# Altium PCB PCB2.PcbDoc (part 1 of 2)
Units mm, origin at the board's own origin, x right, y up, seen from the top; angles counter-clockwise.
Board outline 102 x 102 mm, 2 copper layers (Top Layer, Bottom Layer); 216 components, 12 nets, 485 pads, 0 vias.
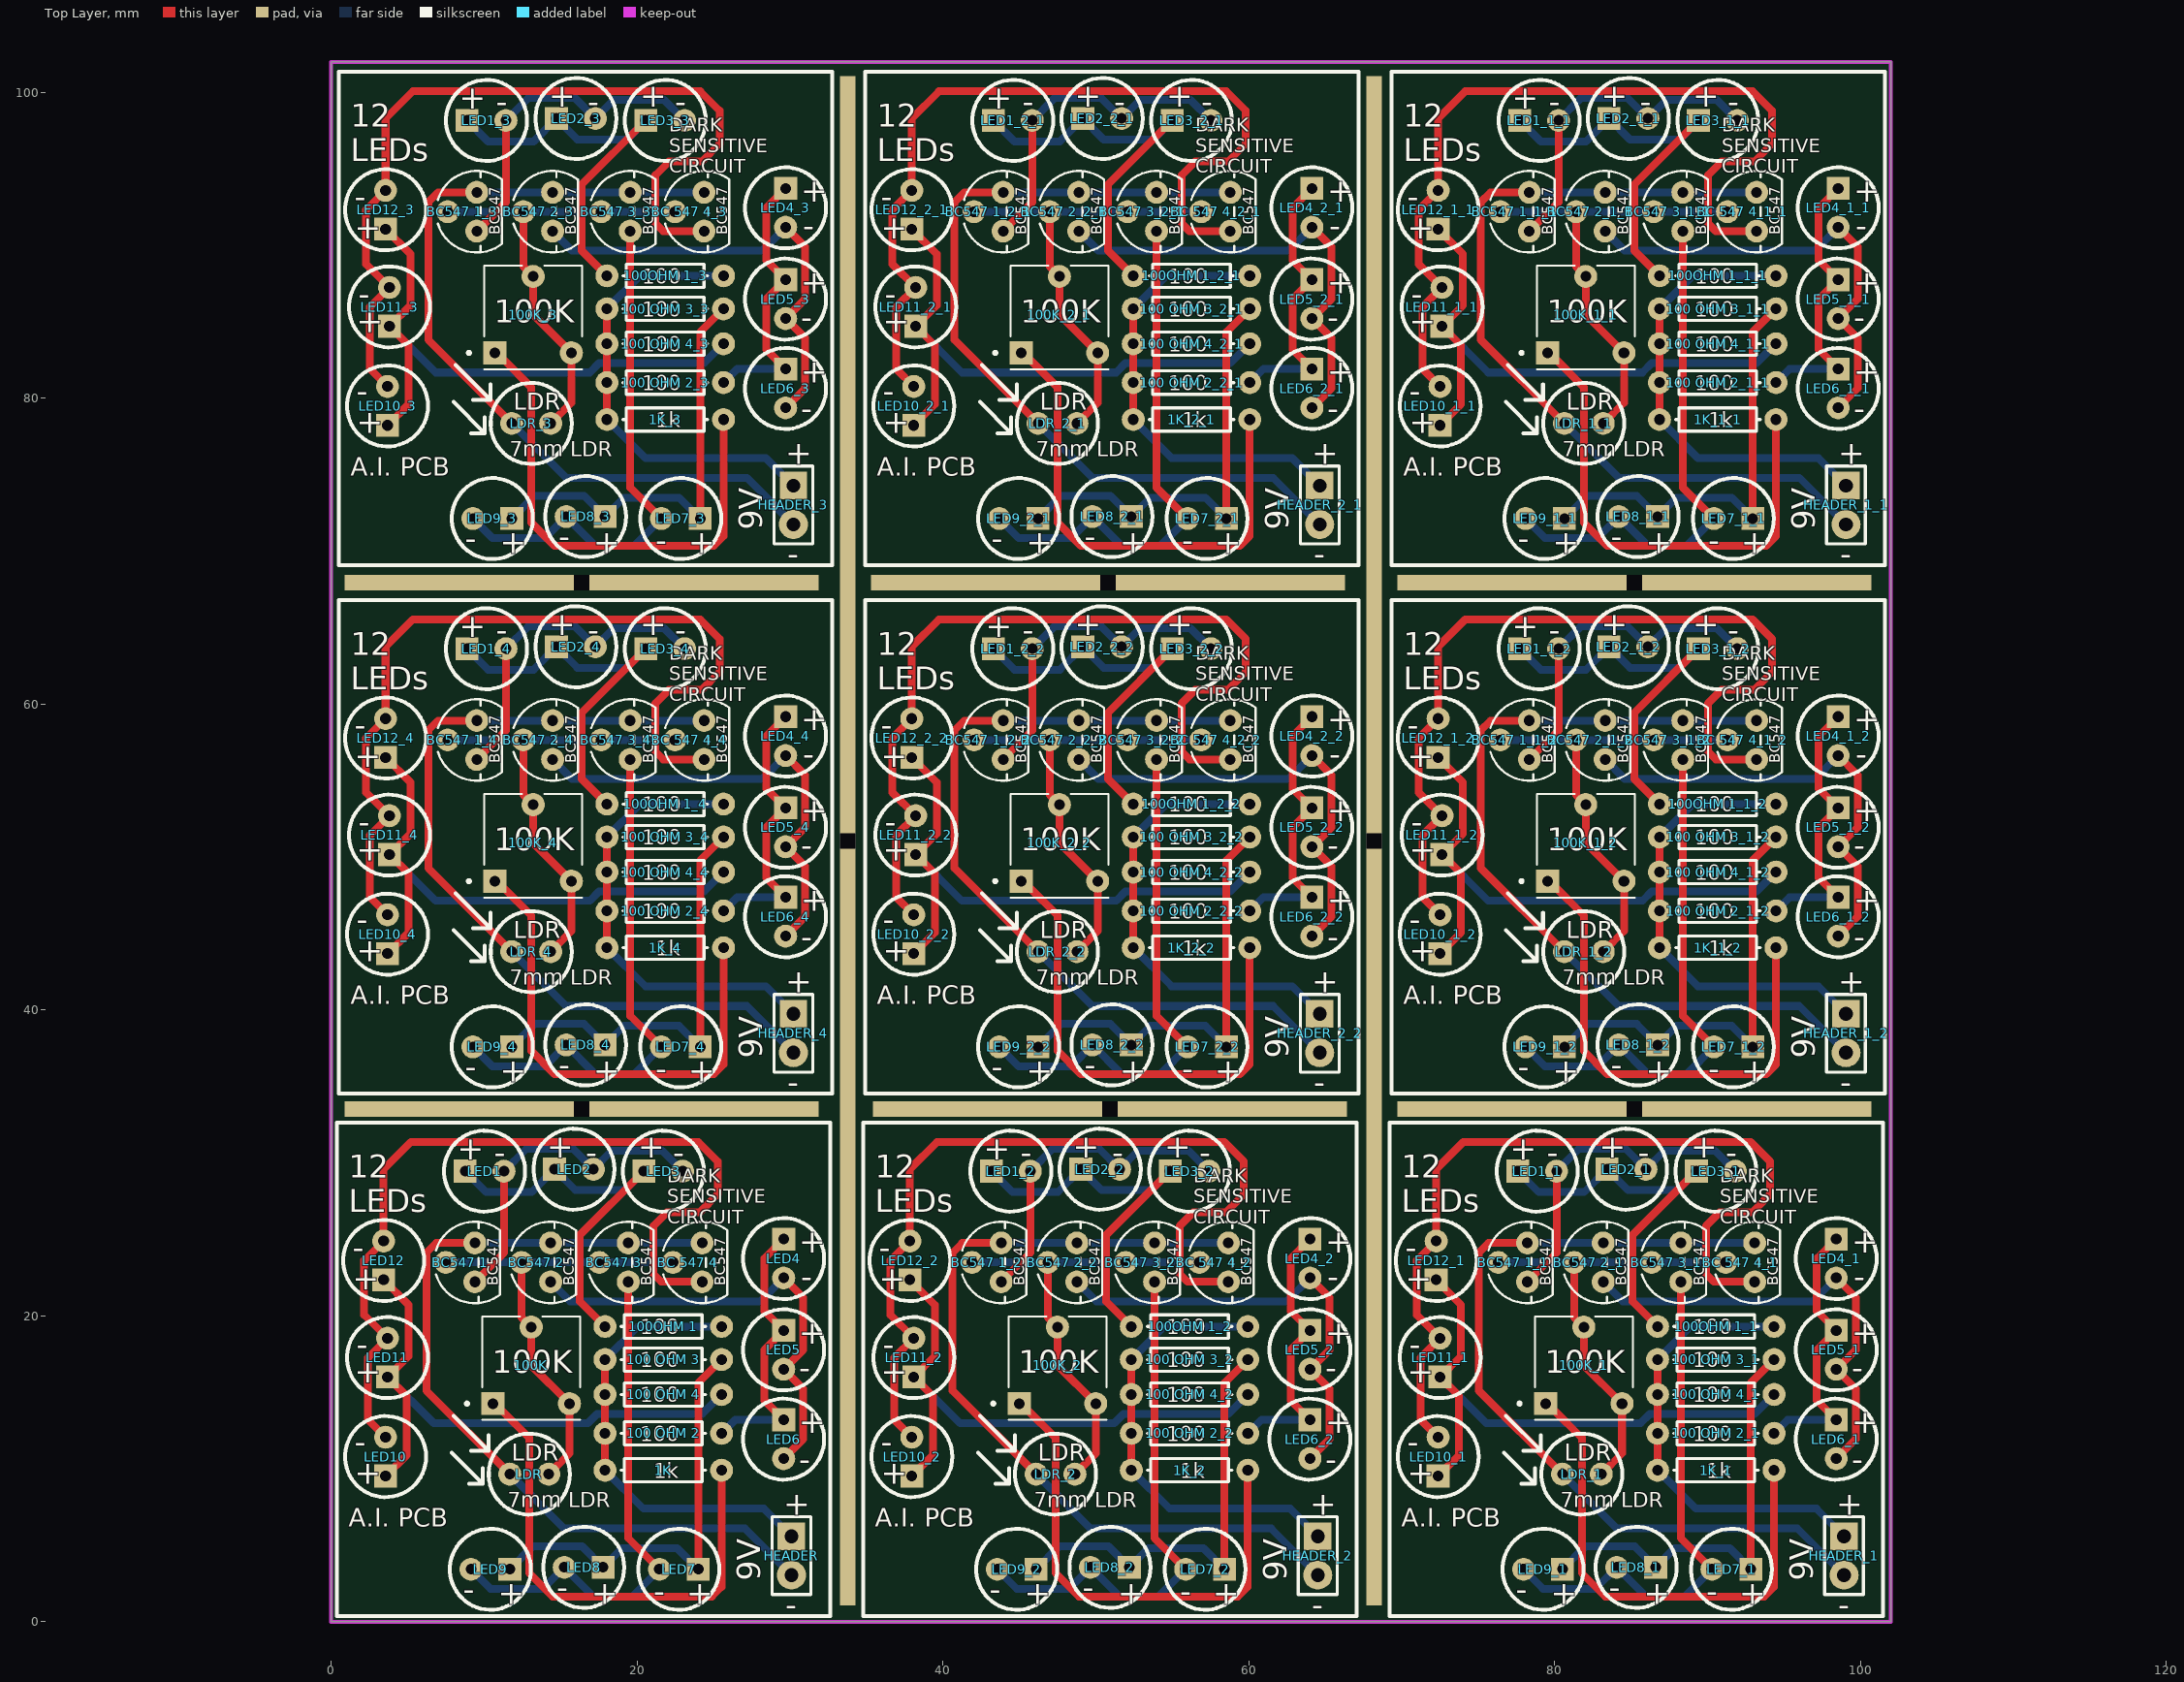
[diagram p0: Top Layer view]
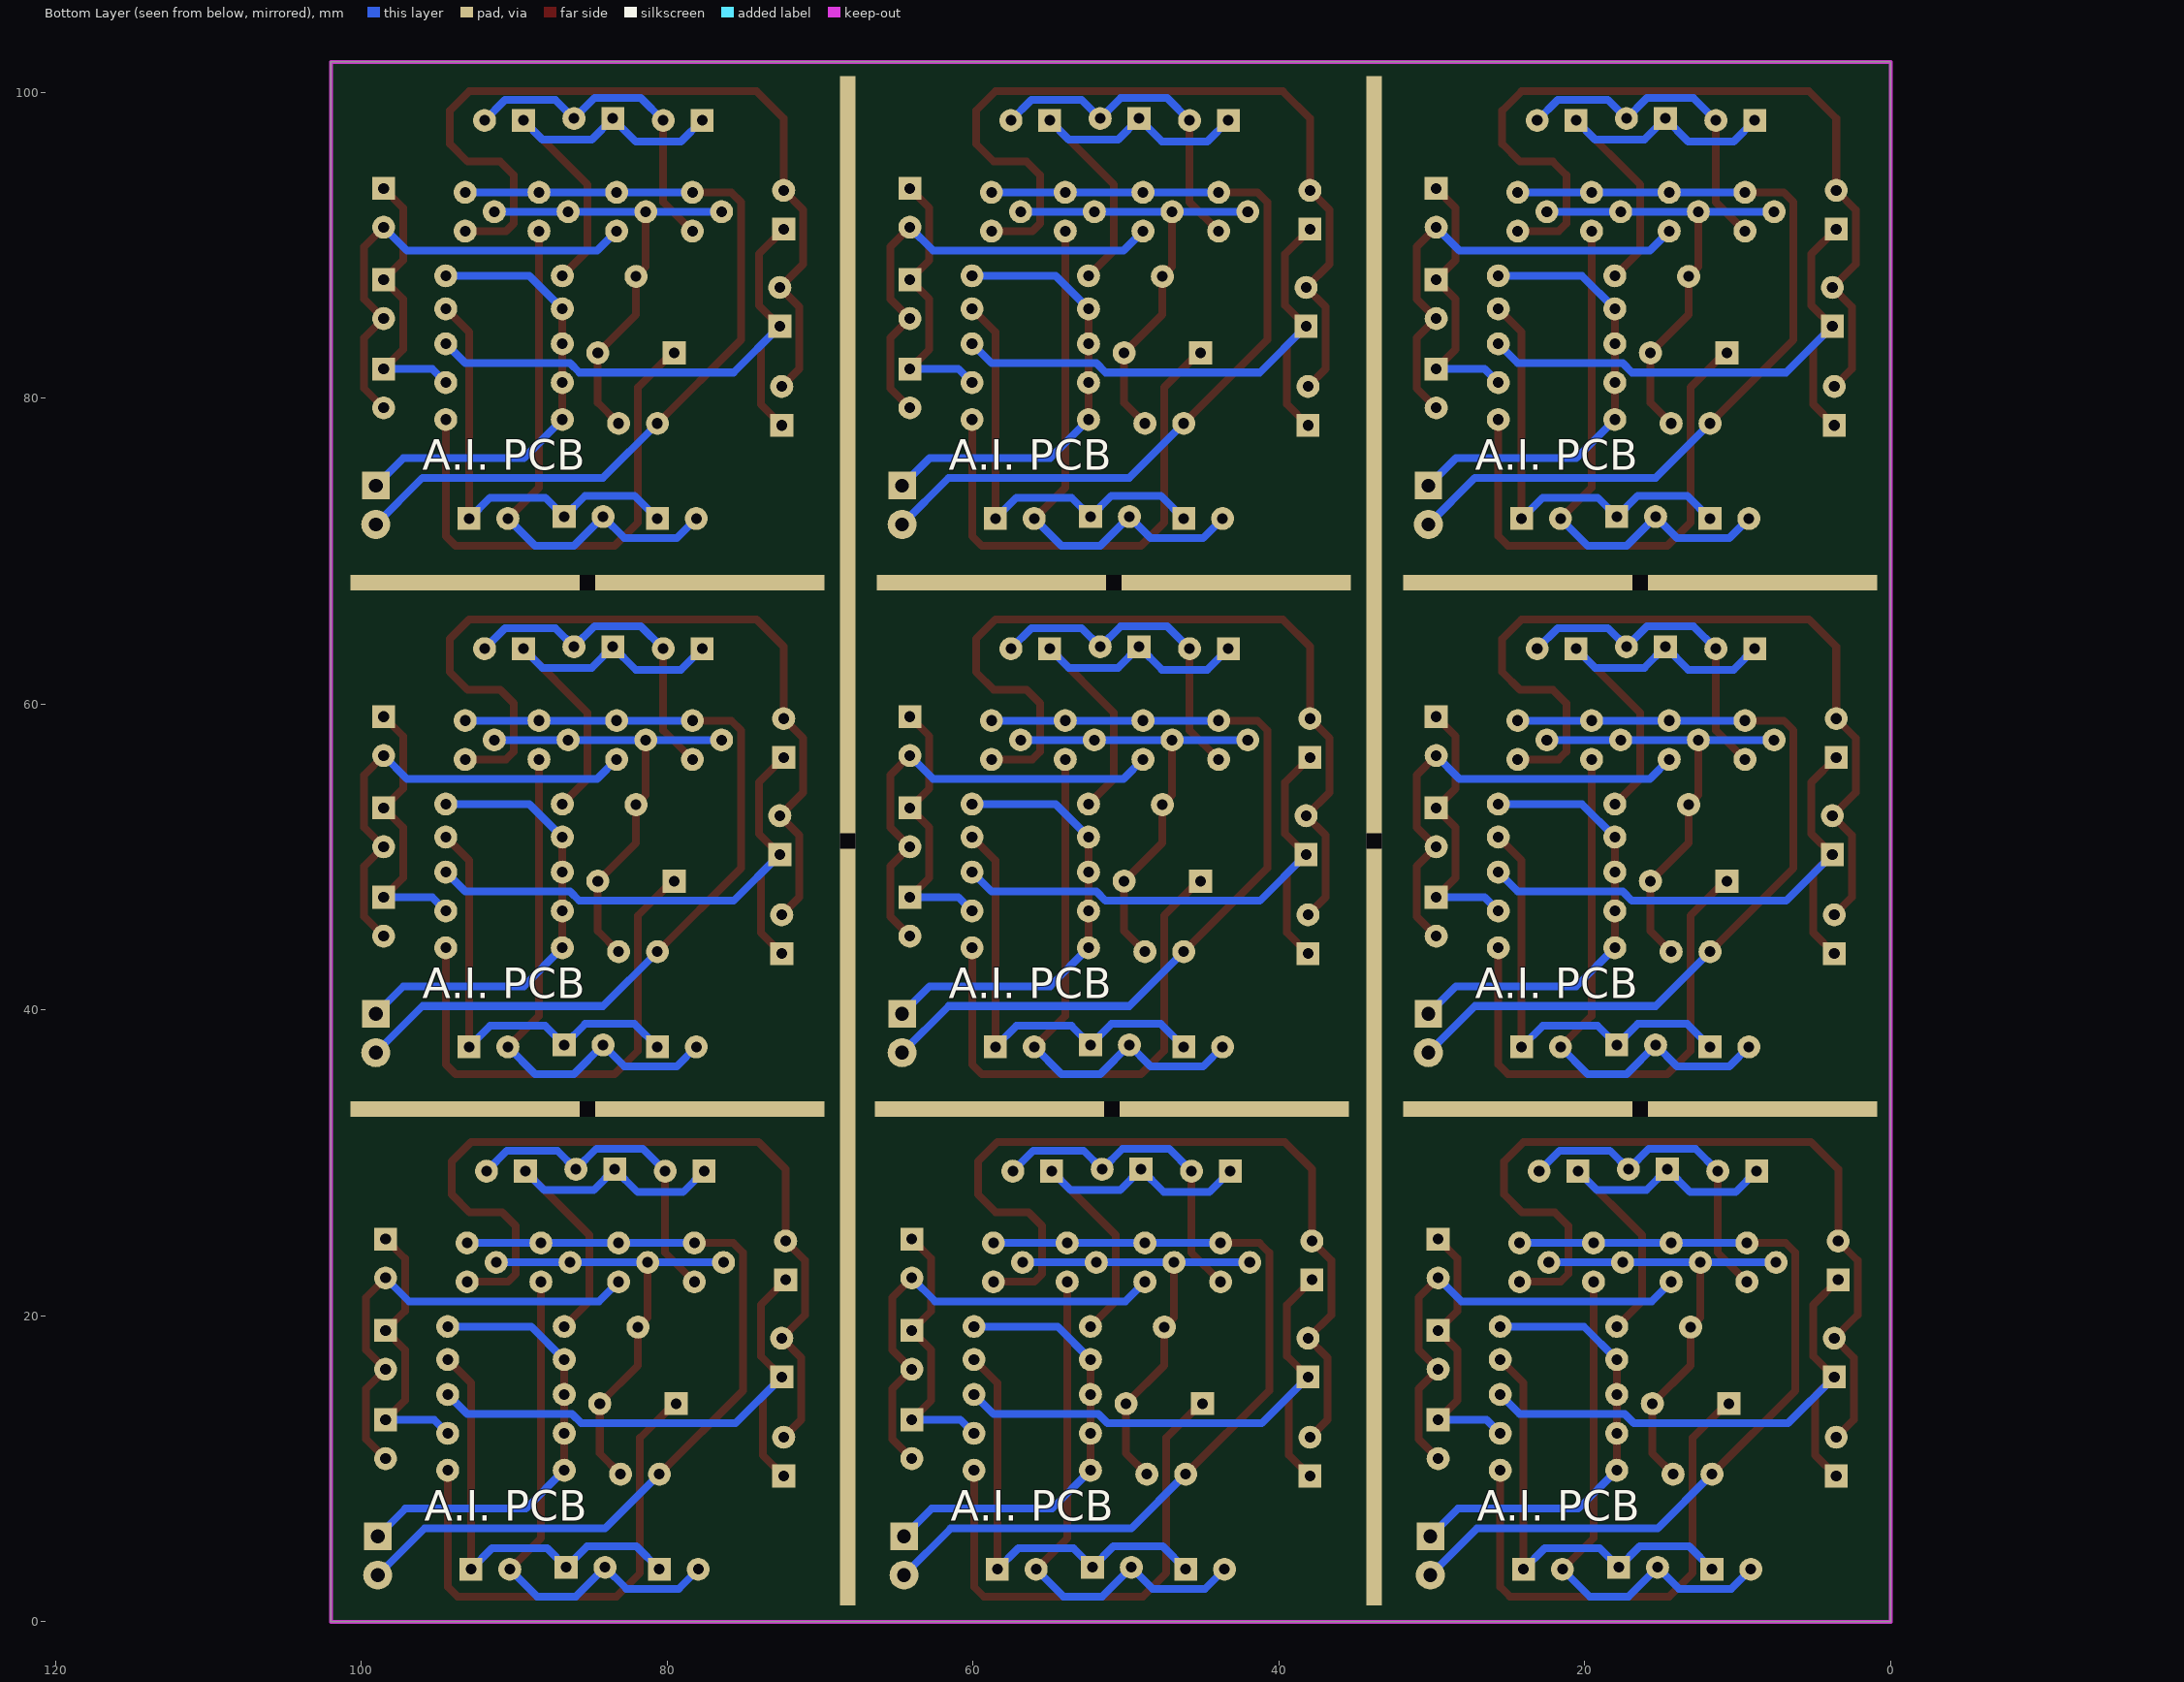
[diagram p1: Bottom Layer view, seen from below]

## Layer stack, top to bottom
Top Solder: solder mask 0.0102, Solder Resist, Dk 3.5
Top Layer: signal copper 0.0356
Dielectric 1: dielectric 0.32, FR-4, Dk 4.8
Bottom Layer: signal copper 0.0356
Bottom Solder: solder mask 0.0102, Solder Resist, Dk 3.5

## Board outline
0,0 0,102 102,102 102,0

## Design rules (kind name [scope] priority, off if disabled: settings)
Clearance [All] p1: gap=0.254 ignorepadtopadclearanceinfootprint=FALSE except(0: Arc-Hole Track-Hole SMDPad-Hole THPad-Hole Via-Hole Fill-Hole Poly-Hole Region-Hole Text-Hole)
PolygonConnect [All] p1: connectstyle=Relief reliefconductorwidth=0.254 reliefentries=4 polygonreliefangle="90 Angle" airgapwidth=0.254
RoutingVias [All] p1: holewidth=0.711 width=1.27 viastyle="Through Hole" minholewidth=0.711 minwidth=1.27 maxholewidth=0.711 maxwidth=1.27
SolderMaskExpansion [All] p1: expansion=0.102
Width [All] p1: maxlimit=0.762 minlimit=0.254 preferedwidth=0.508
30 further rules are at their usual default settings.

## Classes and differential pairs
component class Sheet2: 1K "100 OHM 2" "100 OHM 3" "100 OHM 4" 100K "100OHM 1" "BC547 1" "BC547 2" "BC547 3" "BC 547 4" HEADER LDR LED1 LED2 LED3 LED4 LED5 LED6 LED7 LED8 LED9 LED10 LED11 LED12

## Components (designator, comment, footprint, x,y, rotation, side; value= is the part's Value field where it differs from the comment)
1K "Res1" AXIAL-0.3 21.717,9.906 r180 top value=1K
1K_1 "Res1" AXIAL-0.3 90.551,9.906 r180 top value=1K (schematic designator 1K)
1K_1_1 "Res1" AXIAL-0.3 90.678,78.613 r180 top value=1K (schematic designator 1K)
1K_1_2 "Res1" AXIAL-0.3 90.678,44.069 r180 top value=1K (schematic designator 1K)
1K_2 "Res1" AXIAL-0.3 56.134,9.906 r180 top value=1K (schematic designator 1K)
1K_2_1 "Res1" AXIAL-0.3 56.261,78.613 r180 top value=1K (schematic designator 1K)
1K_2_2 "Res1" AXIAL-0.3 56.261,44.069 r180 top value=1K (schematic designator 1K)
1K_3 "Res1" AXIAL-0.3 21.844,78.613 r180 top value=1K (schematic designator 1K)
1K_4 "Res1" AXIAL-0.3 21.844,44.069 r180 top value=1K (schematic designator 1K)
"100 OHM 2" "Res1" AXIAL-0.3 21.717,12.319 r180 top value=1K
"100 OHM 2_1" "Res1" AXIAL-0.3 90.551,12.319 r180 top value=1K (schematic designator "100 OHM 2")
"100 OHM 2_1_1" "Res1" AXIAL-0.3 90.678,81.026 r180 top value=1K (schematic designator "100 OHM 2")
"100 OHM 2_1_2" "Res1" AXIAL-0.3 90.678,46.482 r180 top value=1K (schematic designator "100 OHM 2")
"100 OHM 2_2" "Res1" AXIAL-0.3 56.134,12.319 r180 top value=1K (schematic designator "100 OHM 2")
"100 OHM 2_2_1" "Res1" AXIAL-0.3 56.261,81.026 r180 top value=1K (schematic designator "100 OHM 2")
"100 OHM 2_2_2" "Res1" AXIAL-0.3 56.261,46.482 r180 top value=1K (schematic designator "100 OHM 2")
"100 OHM 2_3" "Res1" AXIAL-0.3 21.844,81.026 r180 top value=1K (schematic designator "100 OHM 2")
"100 OHM 2_4" "Res1" AXIAL-0.3 21.844,46.482 r180 top value=1K (schematic designator "100 OHM 2")
"100 OHM 3" "Res1" AXIAL-0.3 21.717,17.145 r180 top value=1K
"100 OHM 3_1" "Res1" AXIAL-0.3 90.551,17.145 r180 top value=1K (schematic designator "100 OHM 3")
"100 OHM 3_1_1" "Res1" AXIAL-0.3 90.678,85.852 r180 top value=1K (schematic designator "100 OHM 3")
"100 OHM 3_1_2" "Res1" AXIAL-0.3 90.678,51.308 r180 top value=1K (schematic designator "100 OHM 3")
"100 OHM 3_2" "Res1" AXIAL-0.3 56.134,17.145 r180 top value=1K (schematic designator "100 OHM 3")
"100 OHM 3_2_1" "Res1" AXIAL-0.3 56.261,85.852 r180 top value=1K (schematic designator "100 OHM 3")
"100 OHM 3_2_2" "Res1" AXIAL-0.3 56.261,51.308 r180 top value=1K (schematic designator "100 OHM 3")
"100 OHM 3_3" "Res1" AXIAL-0.3 21.844,85.852 r180 top value=1K (schematic designator "100 OHM 3")
"100 OHM 3_4" "Res1" AXIAL-0.3 21.844,51.308 r180 top value=1K (schematic designator "100 OHM 3")
"100 OHM 4" "Res1" AXIAL-0.3 21.717,14.859 r180 top value=1K
"100 OHM 4_1" "Res1" AXIAL-0.3 90.551,14.859 r180 top value=1K (schematic designator "100 OHM 4")
"100 OHM 4_1_1" "Res1" AXIAL-0.3 90.678,83.566 r180 top value=1K (schematic designator "100 OHM 4")
"100 OHM 4_1_2" "Res1" AXIAL-0.3 90.678,49.022 r180 top value=1K (schematic designator "100 OHM 4")
"100 OHM 4_2" "Res1" AXIAL-0.3 56.134,14.859 r180 top value=1K (schematic designator "100 OHM 4")
"100 OHM 4_2_1" "Res1" AXIAL-0.3 56.261,83.566 r180 top value=1K (schematic designator "100 OHM 4")
"100 OHM 4_2_2" "Res1" AXIAL-0.3 56.261,49.022 r180 top value=1K (schematic designator "100 OHM 4")
"100 OHM 4_3" "Res1" AXIAL-0.3 21.844,83.566 r180 top value=1K (schematic designator "100 OHM 4")
"100 OHM 4_4" "Res1" AXIAL-0.3 21.844,49.022 r180 top value=1K (schematic designator "100 OHM 4")
100K "" *TRIM_EVN-D8AA03B14 13.081,16.764 r0 top
100K_1 "" *TRIM_EVN-D8AA03B14 81.915,16.764 r0 top (schematic designator 100K)
100K_1_1 "" *TRIM_EVN-D8AA03B14 82.042,85.471 r0 top (schematic designator 100K)
100K_1_2 "" *TRIM_EVN-D8AA03B14 82.042,50.927 r0 top (schematic designator 100K)
100K_2 "" *TRIM_EVN-D8AA03B14 47.498,16.764 r0 top (schematic designator 100K)
100K_2_1 "" *TRIM_EVN-D8AA03B14 47.625,85.471 r0 top (schematic designator 100K)
100K_2_2 "" *TRIM_EVN-D8AA03B14 47.625,50.927 r0 top (schematic designator 100K)
100K_3 "" *TRIM_EVN-D8AA03B14 13.208,85.471 r0 top (schematic designator 100K)
100K_4 "" *TRIM_EVN-D8AA03B14 13.208,50.927 r0 top (schematic designator 100K)
"100OHM 1" "Res1" AXIAL-0.3 21.717,19.304 r0 top value=1K
"100OHM 1_1" "Res1" AXIAL-0.3 90.551,19.304 r0 top value=1K (schematic designator "100OHM 1")
"100OHM 1_1_1" "Res1" AXIAL-0.3 90.678,88.011 r0 top value=1K (schematic designator "100OHM 1")
"100OHM 1_1_2" "Res1" AXIAL-0.3 90.678,53.467 r0 top value=1K (schematic designator "100OHM 1")
"100OHM 1_2" "Res1" AXIAL-0.3 56.134,19.304 r0 top value=1K (schematic designator "100OHM 1")
"100OHM 1_2_1" "Res1" AXIAL-0.3 56.261,88.011 r0 top value=1K (schematic designator "100OHM 1")
"100OHM 1_2_2" "Res1" AXIAL-0.3 56.261,53.467 r0 top value=1K (schematic designator "100OHM 1")
"100OHM 1_3" "Res1" AXIAL-0.3 21.844,88.011 r0 top value=1K (schematic designator "100OHM 1")
"100OHM 1_4" "Res1" AXIAL-0.3 21.844,53.467 r0 top value=1K (schematic designator "100OHM 1")
"BC547 1" "BC547*" *TO92 9.398,23.495 r90 top
"BC547 1_1" "BC547*" *TO92 78.232,23.495 r90 top (schematic designator "BC547 1")
"BC547 1_1_1" "BC547*" *TO92 78.359,92.202 r90 top (schematic designator "BC547 1")
"BC547 1_1_2" "BC547*" *TO92 78.359,57.658 r90 top (schematic designator "BC547 1")
"BC547 1_2" "BC547*" *TO92 43.815,23.495 r90 top (schematic designator "BC547 1")
"BC547 1_2_1" "BC547*" *TO92 43.942,92.202 r90 top (schematic designator "BC547 1")
"BC547 1_2_2" "BC547*" *TO92 43.942,57.658 r90 top (schematic designator "BC547 1")
"BC547 1_3" "BC547*" *TO92 9.525,92.202 r90 top (schematic designator "BC547 1")
"BC547 1_4" "BC547*" *TO92 9.525,57.658 r90 top (schematic designator "BC547 1")
"BC547 2" "BC547*" *TO92 14.351,23.495 r90 top
"BC547 2_1" "BC547*" *TO92 83.185,23.495 r90 top (schematic designator "BC547 2")
"BC547 2_1_1" "BC547*" *TO92 83.312,92.202 r90 top (schematic designator "BC547 2")
"BC547 2_1_2" "BC547*" *TO92 83.312,57.658 r90 top (schematic designator "BC547 2")
"BC547 2_2" "BC547*" *TO92 48.768,23.495 r90 top (schematic designator "BC547 2")
"BC547 2_2_1" "BC547*" *TO92 48.895,92.202 r90 top (schematic designator "BC547 2")
"BC547 2_2_2" "BC547*" *TO92 48.895,57.658 r90 top (schematic designator "BC547 2")
"BC547 2_3" "BC547*" *TO92 14.478,92.202 r90 top (schematic designator "BC547 2")
"BC547 2_4" "BC547*" *TO92 14.478,57.658 r90 top (schematic designator "BC547 2")
"BC547 3" "BC547*" *TO92 19.431,23.495 r90 top
"BC547 3_1" "BC547*" *TO92 88.265,23.495 r90 top (schematic designator "BC547 3")
"BC547 3_1_1" "BC547*" *TO92 88.392,92.202 r90 top (schematic designator "BC547 3")
"BC547 3_1_2" "BC547*" *TO92 88.392,57.658 r90 top (schematic designator "BC547 3")
"BC547 3_2" "BC547*" *TO92 53.848,23.495 r90 top (schematic designator "BC547 3")
"BC547 3_2_1" "BC547*" *TO92 53.975,92.202 r90 top (schematic designator "BC547 3")
"BC547 3_2_2" "BC547*" *TO92 53.975,57.658 r90 top (schematic designator "BC547 3")
"BC547 3_3" "BC547*" *TO92 19.558,92.202 r90 top (schematic designator "BC547 3")
"BC547 3_4" "BC547*" *TO92 19.558,57.658 r90 top (schematic designator "BC547 3")
"BC 547 4" "BC547*" *TO92 24.257,23.495 r90 top
"BC 547 4_1" "BC547*" *TO92 93.091,23.495 r90 top (schematic designator "BC 547 4")
"BC 547 4_1_1" "BC547*" *TO92 93.218,92.202 r90 top (schematic designator "BC 547 4")
"BC 547 4_1_2" "BC547*" *TO92 93.218,57.658 r90 top (schematic designator "BC 547 4")
"BC 547 4_2" "BC547*" *TO92 58.674,23.495 r90 top (schematic designator "BC 547 4")
"BC 547 4_2_1" "BC547*" *TO92 58.801,92.202 r90 top (schematic designator "BC 547 4")
"BC 547 4_2_2" "BC547*" *TO92 58.801,57.658 r90 top (schematic designator "BC 547 4")
"BC 547 4_3" "BC547*" *TO92 24.384,92.202 r90 top (schematic designator "BC 547 4")
"BC 547 4_4" "BC547*" *TO92 24.384,57.658 r90 top (schematic designator "BC 547 4")
HEADER "Header 2" HDR1X2 30.099,5.588 r270 top
HEADER_1 "Header 2" HDR1X2 98.933,5.588 r270 top (schematic designator HEADER)
HEADER_1_1 "Header 2" HDR1X2 99.06,74.295 r270 top (schematic designator HEADER)
HEADER_1_2 "Header 2" HDR1X2 99.06,39.751 r270 top (schematic designator HEADER)
HEADER_2 "Header 2" HDR1X2 64.516,5.588 r270 top (schematic designator HEADER)
HEADER_2_1 "Header 2" HDR1X2 64.643,74.295 r270 top (schematic designator HEADER)
HEADER_2_2 "Header 2" HDR1X2 64.643,39.751 r270 top (schematic designator HEADER)
HEADER_3 "Header 2" HDR1X2 30.226,74.295 r270 top (schematic designator HEADER)
HEADER_4 "Header 2" HDR1X2 30.226,39.751 r270 top (schematic designator HEADER)
LDR "L-53GD" L-53GD#1 12.954,9.652 r180 top
LDR_1 "L-53GD" L-53GD#1 81.788,9.652 r180 top (schematic designator LDR)
LDR_1_1 "L-53GD" L-53GD#1 81.915,78.359 r180 top (schematic designator LDR)
LDR_1_2 "L-53GD" L-53GD#1 81.915,43.815 r180 top (schematic designator LDR)
LDR_2 "L-53GD" L-53GD#1 47.371,9.652 r180 top (schematic designator LDR)
LDR_2_1 "L-53GD" L-53GD#1 47.498,78.359 r180 top (schematic designator LDR)
LDR_2_2 "L-53GD" L-53GD#1 47.498,43.815 r180 top (schematic designator LDR)
LDR_3 "L-53GD" L-53GD#1 13.081,78.359 r180 top (schematic designator LDR)
LDR_4 "L-53GD" L-53GD#1 13.081,43.815 r180 top (schematic designator LDR)
LED1 "L-53GD" L-53GD#2 10.033,29.464 r0 top
LED1_1 "L-53GD" L-53GD#2 78.867,29.464 r0 top (schematic designator LED1)
LED1_1_1 "L-53GD" L-53GD#2 78.994,98.171 r0 top (schematic designator LED1)
LED1_1_2 "L-53GD" L-53GD#2 78.994,63.627 r0 top (schematic designator LED1)
LED1_2 "L-53GD" L-53GD#2 44.45,29.464 r0 top (schematic designator LED1)
LED1_2_1 "L-53GD" L-53GD#2 44.577,98.171 r0 top (schematic designator LED1)
LED1_2_2 "L-53GD" L-53GD#2 44.577,63.627 r0 top (schematic designator LED1)
LED1_3 "L-53GD" L-53GD#2 10.16,98.171 r0 top (schematic designator LED1)
LED1_4 "L-53GD" L-53GD#2 10.16,63.627 r0 top (schematic designator LED1)
LED2 "L-53GD" L-53GD#2 15.875,29.591 r0 top
LED2_1 "L-53GD" L-53GD#2 84.709,29.591 r0 top (schematic designator LED2)
LED2_1_1 "L-53GD" L-53GD#2 84.836,98.298 r0 top (schematic designator LED2)
LED2_1_2 "L-53GD" L-53GD#2 84.836,63.754 r0 top (schematic designator LED2)
LED2_2 "L-53GD" L-53GD#2 50.292,29.591 r0 top (schematic designator LED2)
LED2_2_1 "L-53GD" L-53GD#2 50.419,98.298 r0 top (schematic designator LED2)
LED2_2_2 "L-53GD" L-53GD#2 50.419,63.754 r0 top (schematic designator LED2)
LED2_3 "L-53GD" L-53GD#2 16.002,98.298 r0 top (schematic designator LED2)
LED2_4 "L-53GD" L-53GD#2 16.002,63.754 r0 top (schematic designator LED2)
LED3 "L-53GD" L-53GD#2 21.717,29.464 r0 top
LED3_1 "L-53GD" L-53GD#2 90.551,29.464 r0 top (schematic designator LED3)
LED3_1_1 "L-53GD" L-53GD#2 90.678,98.171 r0 top (schematic designator LED3)
LED3_1_2 "L-53GD" L-53GD#2 90.678,63.627 r0 top (schematic designator LED3)
LED3_2 "L-53GD" L-53GD#2 56.134,29.464 r0 top (schematic designator LED3)
LED3_2_1 "L-53GD" L-53GD#2 56.261,98.171 r0 top (schematic designator LED3)
LED3_2_2 "L-53GD" L-53GD#2 56.261,63.627 r0 top (schematic designator LED3)
LED3_3 "L-53GD" L-53GD#2 21.844,98.171 r0 top (schematic designator LED3)
LED3_4 "L-53GD" L-53GD#2 21.844,63.627 r0 top (schematic designator LED3)
LED4 "L-53GD" L-53GD#2 29.591,23.749 r270 top
LED4_1 "L-53GD" L-53GD#2 98.425,23.749 r270 top (schematic designator LED4)
LED4_1_1 "L-53GD" L-53GD#2 98.552,92.456 r270 top (schematic designator LED4)
LED4_1_2 "L-53GD" L-53GD#2 98.552,57.912 r270 top (schematic designator LED4)
LED4_2 "L-53GD" L-53GD#2 64.008,23.749 r270 top (schematic designator LED4)
LED4_2_1 "L-53GD" L-53GD#2 64.135,92.456 r270 top (schematic designator LED4)
LED4_2_2 "L-53GD" L-53GD#2 64.135,57.912 r270 top (schematic designator LED4)
LED4_3 "L-53GD" L-53GD#2 29.718,92.456 r270 top (schematic designator LED4)
LED4_4 "L-53GD" L-53GD#2 29.718,57.912 r270 top (schematic designator LED4)
LED5 "L-53GD" L-53GD#2 29.591,17.78 r270 top
LED5_1 "L-53GD" L-53GD#2 98.425,17.78 r270 top (schematic designator LED5)
LED5_1_1 "L-53GD" L-53GD#2 98.552,86.487 r270 top (schematic designator LED5)
LED5_1_2 "L-53GD" L-53GD#2 98.552,51.943 r270 top (schematic designator LED5)
LED5_2 "L-53GD" L-53GD#2 64.008,17.78 r270 top (schematic designator LED5)
LED5_2_1 "L-53GD" L-53GD#2 64.135,86.487 r270 top (schematic designator LED5)
LED5_2_2 "L-53GD" L-53GD#2 64.135,51.943 r270 top (schematic designator LED5)
LED5_3 "L-53GD" L-53GD#2 29.718,86.487 r270 top (schematic designator LED5)
LED5_4 "L-53GD" L-53GD#2 29.718,51.943 r270 top (schematic designator LED5)
LED6 "L-53GD" L-53GD#2 29.591,11.938 r270 top
LED6_1 "L-53GD" L-53GD#2 98.425,11.938 r270 top (schematic designator LED6)
LED6_1_1 "L-53GD" L-53GD#2 98.552,80.645 r270 top (schematic designator LED6)
LED6_1_2 "L-53GD" L-53GD#2 98.552,46.101 r270 top (schematic designator LED6)
LED6_2 "L-53GD" L-53GD#2 64.008,11.938 r270 top (schematic designator LED6)
LED6_2_1 "L-53GD" L-53GD#2 64.135,80.645 r270 top (schematic designator LED6)
LED6_2_2 "L-53GD" L-53GD#2 64.135,46.101 r270 top (schematic designator LED6)
LED6_3 "L-53GD" L-53GD#2 29.718,80.645 r270 top (schematic designator LED6)
LED6_4 "L-53GD" L-53GD#2 29.718,46.101 r270 top (schematic designator LED6)
LED7 "L-53GD" L-53GD#2 22.733,3.429 r180 top
LED7_1 "L-53GD" L-53GD#2 91.567,3.429 r180 top (schematic designator LED7)
LED7_1_1 "L-53GD" L-53GD#2 91.694,72.136 r180 top (schematic designator LED7)
LED7_1_2 "L-53GD" L-53GD#2 91.694,37.592 r180 top (schematic designator LED7)
LED7_2 "L-53GD" L-53GD#2 57.15,3.429 r180 top (schematic designator LED7)
LED7_2_1 "L-53GD" L-53GD#2 57.277,72.136 r180 top (schematic designator LED7)
LED7_2_2 "L-53GD" L-53GD#2 57.277,37.592 r180 top (schematic designator LED7)
LED7_3 "L-53GD" L-53GD#2 22.86,72.136 r180 top (schematic designator LED7)
LED7_4 "L-53GD" L-53GD#2 22.86,37.592 r180 top (schematic designator LED7)
LED8 "L-53GD" L-53GD#2 16.51,3.556 r180 top
LED8_1 "L-53GD" L-53GD#2 85.344,3.556 r180 top (schematic designator LED8)
LED8_1_1 "L-53GD" L-53GD#2 85.471,72.263 r180 top (schematic designator LED8)
LED8_1_2 "L-53GD" L-53GD#2 85.471,37.719 r180 top (schematic designator LED8)
LED8_2 "L-53GD" L-53GD#2 50.927,3.556 r180 top (schematic designator LED8)
LED8_2_1 "L-53GD" L-53GD#2 51.054,72.263 r180 top (schematic designator LED8)
LED8_2_2 "L-53GD" L-53GD#2 51.054,37.719 r180 top (schematic designator LED8)
LED8_3 "L-53GD" L-53GD#2 16.637,72.263 r180 top (schematic designator LED8)
LED8_4 "L-53GD" L-53GD#2 16.637,37.719 r180 top (schematic designator LED8)
LED9 "L-53GD" L-53GD#2 10.414,3.429 r180 top
LED9_1 "L-53GD" L-53GD#2 79.248,3.429 r180 top (schematic designator LED9)
LED9_1_1 "L-53GD" L-53GD#2 79.375,72.136 r180 top (schematic designator LED9)
LED9_1_2 "L-53GD" L-53GD#2 79.375,37.592 r180 top (schematic designator LED9)
LED9_2 "L-53GD" L-53GD#2 44.831,3.429 r180 top (schematic designator LED9)
LED9_2_1 "L-53GD" L-53GD#2 44.958,72.136 r180 top (schematic designator LED9)
LED9_2_2 "L-53GD" L-53GD#2 44.958,37.592 r180 top (schematic designator LED9)
LED9_3 "L-53GD" L-53GD#2 10.541,72.136 r180 top (schematic designator LED9)
LED9_4 "L-53GD" L-53GD#2 10.541,37.592 r180 top (schematic designator LED9)
LED10 "L-53GD" L-53GD#2 3.556,10.795 r90 top
LED10_1 "L-53GD" L-53GD#2 72.39,10.795 r90 top (schematic designator LED10)
LED10_1_1 "L-53GD" L-53GD#2 72.517,79.502 r90 top (schematic designator LED10)
LED10_1_2 "L-53GD" L-53GD#2 72.517,44.958 r90 top (schematic designator LED10)
LED10_2 "L-53GD" L-53GD#2 37.973,10.795 r90 top (schematic designator LED10)
LED10_2_1 "L-53GD" L-53GD#2 38.1,79.502 r90 top (schematic designator LED10)
LED10_2_2 "L-53GD" L-53GD#2 38.1,44.958 r90 top (schematic designator LED10)
LED10_3 "L-53GD" L-53GD#2 3.683,79.502 r90 top (schematic designator LED10)
LED10_4 "L-53GD" L-53GD#2 3.683,44.958 r90 top (schematic designator LED10)
LED11 "L-53GD" L-53GD#2 3.683,17.272 r90 top
LED11_1 "L-53GD" L-53GD#2 72.517,17.272 r90 top (schematic designator LED11)
LED11_1_1 "L-53GD" L-53GD#2 72.644,85.979 r90 top (schematic designator LED11)
LED11_1_2 "L-53GD" L-53GD#2 72.644,51.435 r90 top (schematic designator LED11)
LED11_2 "L-53GD" L-53GD#2 38.1,17.272 r90 top (schematic designator LED11)
LED11_2_1 "L-53GD" L-53GD#2 38.227,85.979 r90 top (schematic designator LED11)
LED11_2_2 "L-53GD" L-53GD#2 38.227,51.435 r90 top (schematic designator LED11)
LED11_3 "L-53GD" L-53GD#2 3.81,85.979 r90 top (schematic designator LED11)
LED11_4 "L-53GD" L-53GD#2 3.81,51.435 r90 top (schematic designator LED11)
LED12 "L-53GD" L-53GD#2 3.429,23.622 r90 top
LED12_1 "L-53GD" L-53GD#2 72.263,23.622 r90 top (schematic designator LED12)
LED12_1_1 "L-53GD" L-53GD#2 72.39,92.329 r90 top (schematic designator LED12)
LED12_1_2 "L-53GD" L-53GD#2 72.39,57.785 r90 top (schematic designator LED12)
LED12_2 "L-53GD" L-53GD#2 37.846,23.622 r90 top (schematic designator LED12)
LED12_2_1 "L-53GD" L-53GD#2 37.973,92.329 r90 top (schematic designator LED12)
LED12_2_2 "L-53GD" L-53GD#2 37.973,57.785 r90 top (schematic designator LED12)
LED12_3 "L-53GD" L-53GD#2 3.556,92.329 r90 top (schematic designator LED12)
LED12_4 "L-53GD" L-53GD#2 3.556,57.785 r90 top (schematic designator LED12)

## Footprints (in the part's own frame and the unit in brackets; to place one, negate y for a bottom-side part, rotate by r counter-clockwise, add the part's x,y. Pads: shape width x height; smd on the part's side, far side on the other; paste and mask are expansions set on the pad)
*TO92 [mm]
  round 1.5 hole 0.7: 1(-1.27,0) 2(0,1.905) 3(1.27,0)
  Top Layer region: 1.932,0.241 1.568,0.638 1.029,0.662 0.632,0.298 0.608,-0.241 0.972,-0.638 1.511,-0.662 1.908,-0.298
  Top Layer region: 0.662,2.146 0.298,2.543 -0.241,2.567 -0.638,2.203 -0.662,1.664 -0.298,1.267 0.241,1.243 0.638,1.607
  Top Layer region: -0.608,0.241 -0.972,0.638 -1.511,0.662 -1.908,0.298 -1.932,-0.241 -1.568,-0.638 -1.029,-0.662 -0.632,-0.298
  Bottom Layer region: 1.932,0.241 1.568,0.638 1.029,0.662 0.632,0.298 0.608,-0.241 0.972,-0.638 1.511,-0.662 1.908,-0.298
  Bottom Layer region: 0.662,2.146 0.298,2.543 -0.241,2.567 -0.638,2.203 -0.662,1.664 -0.298,1.267 0.241,1.243 0.638,1.607
  Bottom Layer region: -0.608,0.241 -0.972,0.638 -1.511,0.662 -1.908,0.298 -1.932,-0.241 -1.568,-0.638 -1.029,-0.662 -0.632,-0.298
  Multi-Layer region: 1.932,0.241 1.568,0.638 1.029,0.662 0.632,0.298 0.608,-0.241 0.972,-0.638 1.511,-0.662 1.908,-0.298
  Multi-Layer region: 0.662,2.146 0.298,2.543 -0.241,2.567 -0.638,2.203 -0.662,1.664 -0.298,1.267 0.241,1.243 0.638,1.607
  Multi-Layer region: -0.608,0.241 -0.972,0.638 -1.511,0.662 -1.908,0.298 -1.932,-0.241 -1.568,-0.638 -1.029,-0.662 -0.632,-0.298
  silkscreen extent -2.66,-1.65 2.66,2.55
*TRIM_EVN-D8AA03B14 [mm]
  rect 1.508x1.508 hole 0.7: 1(-2.5,-2.5)
  round 1.508 hole 0.7: 2(0,2.5) 3(2.5,-2.5)
  silkscreen extent -4.3,-3.57 3.2,3.2
AXIAL-0.3 [mm] "Axial Device, Thru-Hole; 2 Leads; 0.3 in Pin Spacing"
  round 1.5 hole 0.7: 1(-3.81,0) 2(3.81,0)
  silkscreen extent -2.77,-0.76 2.77,0.76
HDR1X2 [mm] "Connector; Header; 2 Position"
  rect 1.8x1.8 hole 0.9: 1(0,0)
  round 1.9 hole 0.9: 2(2.54,0)
  silkscreen extent -1.27,-1.27 3.81,1.27
L-53GD#1 [mm]
  round 1.5 hole 0.7: 1(-1.27,0) 2(1.27,0)
  silkscreen extent -2.65,-2.65 2.65,2.65
L-53GD#2 [mm]
  rect 1.5x1.5 hole 0.7: 1(-1.27,0)
  round 1.5 hole 0.7: 2(1.27,0)
  silkscreen extent -2.65,-2.65 2.65,2.65

## Part data
1K 1K_1 1K_1_1 1K_1_2 1K_2 1K_2_1 1K_2_2 1K_3 1K_4 "100 OHM 2" "100 OHM 2_1" "100 OHM 2_1_1" "100 OHM 2_1_2" "100 OHM 2_2" "100 OHM 2_2_1" "100 OHM 2_2_2" "100 OHM 2_3" "100 OHM 2_4" "100 OHM 3" "100 OHM 3_1" "100 OHM 3_1_1" "100 OHM 3_1_2" "100 OHM 3_2" "100 OHM 3_2_1" "100 OHM 3_2_2" "100 OHM 3_3" "100 OHM 3_4" "100 OHM 4" "100 OHM 4_1" "100 OHM 4_1_1" "100 OHM 4_1_2" "100 OHM 4_2" "100 OHM 4_2_1" "100 OHM 4_2_2" "100 OHM 4_3" "100 OHM 4_4" "100OHM 1" "100OHM 1_1" "100OHM 1_1_1" "100OHM 1_1_2" "100OHM 1_2" "100OHM 1_2_1" "100OHM 1_2_2" "100OHM 1_3" "100OHM 1_4": "Resistor", LatestRevisionDate=17-Jul-2002, LatestRevisionNote="Re-released for DXP Platform.", PackageDescription="Axial Device, Thru-Hole; 2 Leads; 0.3 in Pin Spacing", PackageReference=AXIAL-0.3, Published=8-Jun-2000, Publisher="Altium Limited"
100K 100K_1 100K_1_1 100K_1_2 100K_2 100K_2_1 100K_2_2 100K_3 100K_4: library part EVN-D8AA03B14, "Trimmer; Carbon; Rest 10 Kilohms; PCB; 1 Turn; Pwr-Rtg 0.1 W; Linear; Top Adj; 6 mm SQ", Package="PQFP-44 Panasonic", Availability=Unavailable, MF="Panasonic Electronic", MP=EVN-D8AA03B14, Price=None, SnapEDA_Link=https://www.snapeda.com/parts/EVN-D8AA03B14/Panasonic%20Electronic%20Components/view-part/?ref=snap
"BC547 1" "BC547 1_1" "BC547 1_1_1" "BC547 1_1_2" "BC547 1_2" "BC547 1_2_1" "BC547 1_2_2" "BC547 1_3" "BC547 1_4" "BC547 2" "BC547 2_1" "BC547 2_1_1" "BC547 2_1_2" "BC547 2_2" "BC547 2_2_1" "BC547 2_2_2" "BC547 2_3" "BC547 2_4" "BC547 3" "BC547 3_1" "BC547 3_1_1" "BC547 3_1_2" "BC547 3_2" "BC547 3_2_1" "BC547 3_2_2" "BC547 3_3" "BC547 3_4" "BC 547 4" "BC 547 4_1" "BC 547 4_1_1" "BC 547 4_1_2" "BC 547 4_2" "BC 547 4_2_1" "BC 547 4_2_2" "BC 547 4_3" "BC 547 4_4": "Transistor NPN BC547 PHILIPS miliampere=100 TO92", Package="TO-92 ON Semiconductor", Availability=Unavailable, MF="ON Semiconductor", MP=BC547, Price=None, SnapEDA_Link=https://www.snapeda.com/parts/BC547/ON%20Semiconductor/view-part/?ref=snap
HEADER HEADER_1 HEADER_1_1 HEADER_1_2 HEADER_2 HEADER_2_1 HEADER_2_2 HEADER_3 HEADER_4: "Header, 2-Pin", LatestRevisionDate=17-Jul-2002, LatestRevisionNote="Re-released for DXP Platform.", Publisher="Altium Limited"
LDR LDR_1 LDR_1_1 LDR_1_2 LDR_2 LDR_2_1 LDR_2_2 LDR_3 LDR_4 LED1 LED1_1 LED1_1_1 LED1_1_2 LED1_2 LED1_2_1 LED1_2_2 LED1_3 LED1_4 LED2 LED2_1 LED2_1_1 LED2_1_2 LED2_2 LED2_2_1 LED2_2_2 LED2_3 LED2_4 LED3 LED3_1 LED3_1_1 LED3_1_2 LED3_2 LED3_2_1 LED3_2_2 LED3_3 LED3_4 LED4 LED4_1 LED4_1_1 LED4_1_2 LED4_2 LED4_2_1 LED4_2_2 LED4_3 LED4_4 LED5 LED5_1 LED5_1_1 LED5_1_2 LED5_2 LED5_2_1 LED5_2_2 LED5_3 LED5_4 LED6 LED6_1 LED6_1_1 LED6_1_2 LED6_2 LED6_2_1 LED6_2_2 LED6_3 LED6_4 LED7 LED7_1 LED7_1_1 LED7_1_2 LED7_2 LED7_2_1 LED7_2_2 LED7_3 LED7_4 LED8 LED8_1 LED8_1_1 LED8_1_2 LED8_2 LED8_2_1 LED8_2_2 LED8_3 LED8_4 LED9 LED9_1 LED9_1_1 LED9_1_2 LED9_2 LED9_2_1 LED9_2_2 LED9_3 LED9_4 LED10 LED10_1 LED10_1_1 LED10_1_2 LED10_2 LED10_2_1 LED10_2_2 LED10_3 LED10_4 LED11 LED11_1 LED11_1_1 LED11_1_2 LED11_2 LED11_2_1 LED11_2_2 LED11_3 LED11_4 LED12 LED12_1 LED12_1_1 LED12_1_2 LED12_2 LED12_2_1 LED12_2_2 LED12_3 LED12_4: "LED", Manufacturer_Name=Kingbright, Mouser Part Number=N/A, RS Part Number=2286004A, Allied_Number=70424261, Allied Price/Stock=http://www.alliedelec.com/kingbright-l-53gd/70424261/, Datasheet Link=http://docs-emea.rs-online.com/webdocs/151e/0900766b8151e408.pdf, Manufacturer_Part_Number=L-53GD, Mouser Price/Stock=https://www.mouser.com/Search/Refine.aspx?Keyword=N%2FA, RS Price/Stock=http://uk.rs-online.com/web/p/products/2286004A

## Free pads (board coordinates)
  rect 1x100 hole 1 square: 2(33.782,51.054) 2(68.199,51.054)
  rect 31x1 hole 1 square: 3(16.383,33.528) 3(16.383,67.945) 3(50.8,67.945) 3(50.927,33.528) 3(85.217,33.528) 3(85.217,67.945)

## Nets (pads, with @x,y where several pads share a name; then routed paths per layer and width w, separated by ;. In a path a pad name is that pad's centre, name@x,y a point inside that pad or via, vN(x,y) a via of type N, cw(c..) or ccw(c..) an arc to the next point about the centre after c; other vN are vias at no path point)
Net1K_1: 1K.1 100K.1 | length 33.2
  Top Layer w0.508: 100K.1@10.581,14.264 11.002,13.843 11.129,13.843 12.954,12.018 12.954,3.175 14.478,1.651 24.892,1.651 25.527,2.286 1K.1@25.527,9.906
Net1K_2: 1K.2 "100 OHM 2.2" "100 OHM 3.2" "100 OHM 4.2" "100OHM 1.2" HEADER.1 | length 29.7
  Top Layer w0.508: 1K.2@17.907,9.906 17.907,12.319 17.907,14.859 17.907,17.145
  Bottom Layer w0.508: 1K.2@17.907,9.906 20.422,7.391 28.296,7.391 HEADER.1@30.099,5.588 ; 17.907,17.145 20.066,19.304 25.527,19.304
"Net100 OHM 2_1": "100 OHM 2.1" LED4.1 LED5.1 LED6.1 | length 18.3
  Top Layer w0.508: LED6.1@29.591,13.208 28.321,14.478 28.321,17.78 LED5.1@29.591,19.05 28.321,20.32 28.321,23.749 LED4.1@29.591,25.019
  Bottom Layer w0.508: 25.527,12.319 26.416,13.208 LED6.1@29.591,13.208
"Net100 OHM 3_1": "100 OHM 3.1" LED7.1 LED8.1 LED9.1 | length 28.9
  Top Layer w0.508: LED7.1@24.003,3.429 24.003,15.621 25.527,17.145
  Bottom Layer w0.508: LED9.1@11.684,3.429 13.183,4.928 16.408,4.928 LED8.1@17.78,3.556 19.025,4.801 22.631,4.801 LED7.1@24.003,3.429
"Net100 OHM 4_1": "100 OHM 4.1" LED10.1 LED11.1 LED12.1 | length 39
  Top Layer w0.508: LED12.1@3.429,22.352 5.055,20.726 5.055,17.374 LED11.1@3.683,16.002 4.928,14.757 4.928,10.897 LED10.1@3.556,9.525
  Bottom Layer w0.508: LED11.1@3.683,16.002 6.706,12.979 16.788,12.979 17.398,13.589 24.257,13.589 25.527,14.859
Net100K_2: 100K.2 100K.3 "BC547 1.2" "BC547 2.2" "BC547 3.2" "BC 547 4.2" LDR.1 | length 30.6
  Top Layer w0.508: 12.446,23.495 12.446,19.899 100K.2@13.081,19.264 13.081,16.764 100K.3@15.581,14.264 15.581,11.009 LDR.1@14.224,9.652
  Bottom Layer w0.508: 7.493,23.495 12.446,23.495 17.526,23.495 22.352,23.495
"Net100OHM 1_1": "100OHM 1.1" LED1.1 LED2.1 LED3.1 | length 26.5
  Top Layer w0.508: 17.907,19.304 16.256,20.955 16.256,25.273 LED3.1@20.447,29.464
  Bottom Layer w0.508: LED1.1@8.763,29.464 10.135,28.092 13.106,28.092 LED2.1@14.605,29.591 15.977,28.219 19.202,28.219 LED3.1@20.447,29.464
"NetBC547 1_1": "BC547 1.1" LED1.2 LED2.2 LED3.2 | length 21.9
  Top Layer w0.508: 9.398,22.225 11.303,24.13 LED1.2@11.303,29.464
  Bottom Layer w0.508: LED1.2@11.303,29.464 12.776,30.937 15.799,30.937 LED2.2@17.145,29.591 18.364,30.81 21.641,30.81 LED3.2@22.987,29.464
"NetBC547 1_3": "BC547 1.3" "BC547 2.3" "BC547 3.3" "BC 547 4.3" HEADER.2 LDR.2 | length 56.2
  Top Layer w0.508: 9.398,24.765 6.858,24.765 6.223,24.13 6.223,15.113 LDR.2@11.684,9.652
  Bottom Layer w0.508: 9.398,24.765 14.351,24.765 19.431,24.765 24.257,24.765 ; LDR.2@11.684,9.652 15.24,6.096 27.051,6.096 HEADER.2@30.099,3.048
"NetBC547 2_1": "BC547 2.1" LED4.2 LED5.2 LED6.2 | length 30.3
  Top Layer w0.508: LED6.2@29.591,10.668 30.861,11.938 30.861,15.24 LED5.2@29.591,16.51 30.861,17.78 30.861,21.209 LED4.2@29.591,22.479
  Bottom Layer w0.508: 14.351,22.225 15.621,20.955 28.067,20.955 LED4.2@29.591,22.479
"NetBC547 3_1": "BC547 3.1" LED7.2 LED8.2 LED9.2 | length 34.6
  Top Layer w0.508: 19.431,22.225 19.431,5.461 LED7.2@21.463,3.429
  Bottom Layer w0.508: LED9.2@9.144,3.429 10.414,2.159 13.843,2.159 LED8.2@15.24,3.556 17.145,1.651 19.685,1.651 LED7.2@21.463,3.429
"NetBC 547 4_1": "BC 547 4.1" LED10.2 LED11.2 LED12.2 | length 56.5
  Top Layer w0.508: LED10.2@3.556,12.065 2.413,13.208 2.413,17.272 LED11.2@3.683,18.542 2.159,20.066 2.159,23.622 LED12.2@3.429,24.892 3.429,29.591 5.207,31.369 24.003,31.369 25.273,30.099 25.273,27.94 24.105,26.772 21.971,26.772 21.082,25.883 21.082,22.733 21.59,22.225 24.257,22.225
pads on no net: 1K_1.1 1K_1.2 1K_1_1.1 1K_1_1.2 1K_1_2.1 1K_1_2.2 1K_2.1 1K_2.2 1K_2_1.1 1K_2_1.2 1K_2_2.1 1K_2_2.2 1K_3.1 1K_3.2 1K_4.1 1K_4.2 100K_1.1 100K_1.2 100K_1.3 100K_1_1.1 100K_1_1.2 100K_1_1.3 100K_1_2.1 100K_1_2.2 100K_1_2.3 100K_2.1 100K_2.2 100K_2.3 100K_2_1.1 100K_2_1.2 100K_2_1.3 100K_2_2.1 100K_2_2.2 100K_2_2.3 100K_3.1 100K_3.2 100K_3.3 100K_4.1 100K_4.2 100K_4.3 "100 OHM 2_1.1" "100 OHM 2_1.2" "100 OHM 2_1_1.1" "100 OHM 2_1_1.2" "100 OHM 2_1_2.1" "100 OHM 2_1_2.2" "100 OHM 2_2.1" "100 OHM 2_2.2" "100 OHM 2_2_1.1" "100 OHM 2_2_1.2" "100 OHM 2_2_2.1" "100 OHM 2_2_2.2" "100 OHM 2_3.1" "100 OHM 2_3.2" "100 OHM 2_4.1" "100 OHM 2_4.2" "100 OHM 3_1.1" "100 OHM 3_1.2" "100 OHM 3_1_1.1" "100 OHM 3_1_1.2" "100 OHM 3_1_2.1" "100 OHM 3_1_2.2" "100 OHM 3_2.1" "100 OHM 3_2.2" "100 OHM 3_2_1.1" "100 OHM 3_2_1.2" "100 OHM 3_2_2.1" "100 OHM 3_2_2.2" "100 OHM 3_3.1" "100 OHM 3_3.2" "100 OHM 3_4.1" "100 OHM 3_4.2" "100 OHM 4_1.1" "100 OHM 4_1.2" "100 OHM 4_1_1.1" "100 OHM 4_1_1.2" "100 OHM 4_1_2.1" "100 OHM 4_1_2.2" "100 OHM 4_2.1" "100 OHM 4_2.2" "100 OHM 4_2_1.1" "100 OHM 4_2_1.2" "100 OHM 4_2_2.1" "100 OHM 4_2_2.2" "100 OHM 4_3.1" "100 OHM 4_3.2" "100 OHM 4_4.1" "100 OHM 4_4.2" "100OHM 1_1.1" "100OHM 1_1.2" "100OHM 1_1_1.1" "100OHM 1_1_1.2" "100OHM 1_1_2.1" "100OHM 1_1_2.2" "100OHM 1_2.1" "100OHM 1_2.2" "100OHM 1_2_1.1" "100OHM 1_2_1.2" "100OHM 1_2_2.1" "100OHM 1_2_2.2" "100OHM 1_3.1" "100OHM 1_3.2" "100OHM 1_4.1" "100OHM 1_4.2" "BC547 1_1.1" "BC547 1_1.2" "BC547 1_1.3" "BC547 1_1_1.1" "BC547 1_1_1.2" "BC547 1_1_1.3" "BC547 1_1_2.1" "BC547 1_1_2.2" "BC547 1_1_2.3" "BC547 1_2.1" "BC547 1_2.2" "BC547 1_2.3" "BC547 1_2_1.1" "BC547 1_2_1.2" "BC547 1_2_1.3" "BC547 1_2_2.1" "BC547 1_2_2.2" "BC547 1_2_2.3" "BC547 1_3.1" "BC547 1_3.2" "BC547 1_3.3" "BC547 1_4.1" "BC547 1_4.2" "BC547 1_4.3" "BC547 2_1.1" "BC547 2_1.2" "BC547 2_1.3" "BC547 2_1_1.1" "BC547 2_1_1.2" "BC547 2_1_1.3" "BC547 2_1_2.1" "BC547 2_1_2.2" "BC547 2_1_2.3" "BC547 2_2.1" "BC547 2_2.2" "BC547 2_2.3" "BC547 2_2_1.1" "BC547 2_2_1.2" "BC547 2_2_1.3" "BC547 2_2_2.1" "BC547 2_2_2.2" "BC547 2_2_2.3" "BC547 2_3.1" "BC547 2_3.2" "BC547 2_3.3" "BC547 2_4.1" "BC547 2_4.2" "BC547 2_4.3" "BC547 3_1.1" "BC547 3_1.2" "BC547 3_1.3" "BC547 3_1_1.1" "BC547 3_1_1.2" "BC547 3_1_1.3" "BC547 3_1_2.1" "BC547 3_1_2.2" "BC547 3_1_2.3" "BC547 3_2.1" "BC547 3_2.2" "BC547 3_2.3" "BC547 3_2_1.1" "BC547 3_2_1.2" "BC547 3_2_1.3" "BC547 3_2_2.1" "BC547 3_2_2.2" "BC547 3_2_2.3" "BC547 3_3.1" "BC547 3_3.2" "BC547 3_3.3" "BC547 3_4.1" "BC547 3_4.2" "BC547 3_4.3" "BC 547 4_1.1" "BC 547 4_1.2" "BC 547 4_1.3" "BC 547 4_1_1.1" "BC 547 4_1_1.2" "BC 547 4_1_1.3" "BC 547 4_1_2.1" "BC 547 4_1_2.2" "BC 547 4_1_2.3" "BC 547 4_2.1" "BC 547 4_2.2" "BC 547 4_2.3" "BC 547 4_2_1.1" "BC 547 4_2_1.2" "BC 547 4_2_1.3" "BC 547 4_2_2.1" "BC 547 4_2_2.2" "BC 547 4_2_2.3" "BC 547 4_3.1" "BC 547 4_3.2" "BC 547 4_3.3" "BC 547 4_4.1" "BC 547 4_4.2" "BC 547 4_4.3" HEADER_1.1 HEADER_1.2 HEADER_1_1.1 HEADER_1_1.2 HEADER_1_2.1 HEADER_1_2.2 HEADER_2.1 HEADER_2.2 HEADER_2_1.1 HEADER_2_1.2 HEADER_2_2.1 HEADER_2_2.2 HEADER_3.1 HEADER_3.2 HEADER_4.1 HEADER_4.2 LDR_1.1 LDR_1.2 LDR_1_1.1 LDR_1_1.2 LDR_1_2.1 LDR_1_2.2 LDR_2.1 LDR_2.2 LDR_2_1.1 LDR_2_1.2 LDR_2_2.1 LDR_2_2.2 LDR_3.1 LDR_3.2 LDR_4.1 LDR_4.2 LED1_1.1 LED1_1.2 LED1_1_1.1 LED1_1_1.2 LED1_1_2.1 LED1_1_2.2 LED1_2.1 LED1_2.2 LED1_2_1.1 LED1_2_1.2 LED1_2_2.1 LED1_2_2.2 LED1_3.1 LED1_3.2 LED1_4.1 LED1_4.2 LED2_1.1 LED2_1.2 LED2_1_1.1 LED2_1_1.2 LED2_1_2.1 LED2_1_2.2 LED2_2.1 LED2_2.2 LED2_2_1.1 LED2_2_1.2 LED2_2_2.1 LED2_2_2.2 LED2_3.1 LED2_3.2 LED2_4.1 LED2_4.2 LED3_1.1 LED3_1.2 LED3_1_1.1 LED3_1_1.2 LED3_1_2.1 LED3_1_2.2 LED3_2.1 LED3_2.2 LED3_2_1.1 LED3_2_1.2 LED3_2_2.1 LED3_2_2.2 LED3_3.1 LED3_3.2 LED3_4.1 LED3_4.2 LED4_1.1 LED4_1.2 LED4_1_1.1 LED4_1_1.2 LED4_1_2.1 LED4_1_2.2 LED4_2.1 LED4_2.2 LED4_2_1.1 LED4_2_1.2 LED4_2_2.1 LED4_2_2.2 LED4_3.1 LED4_3.2 LED4_4.1 LED4_4.2 LED5_1.1 LED5_1.2 LED5_1_1.1 LED5_1_1.2 LED5_1_2.1 LED5_1_2.2 LED5_2.1 LED5_2.2 LED5_2_1.1 LED5_2_1.2 LED5_2_2.1 LED5_2_2.2 LED5_3.1 LED5_3.2 LED5_4.1 LED5_4.2 LED6_1.1 LED6_1.2 LED6_1_1.1 LED6_1_1.2 LED6_1_2.1 LED6_1_2.2 LED6_2.1 LED6_2.2 LED6_2_1.1 LED6_2_1.2 LED6_2_2.1 LED6_2_2.2 LED6_3.1 LED6_3.2 LED6_4.1 LED6_4.2 LED7_1.1 LED7_1.2 LED7_1_1.1 LED7_1_1.2 LED7_1_2.1 LED7_1_2.2 LED7_2.1 LED7_2.2 LED7_2_1.1 LED7_2_1.2 LED7_2_2.1 LED7_2_2.2 LED7_3.1 LED7_3.2 LED7_4.1 LED7_4.2 LED8_1.1 LED8_1.2 LED8_1_1.1 LED8_1_1.2 LED8_1_2.1 LED8_1_2.2 LED8_2.1 LED8_2.2 LED8_2_1.1 LED8_2_1.2 LED8_2_2.1 LED8_2_2.2 LED8_3.1 LED8_3.2 LED8_4.1 LED8_4.2 LED9_1.1 LED9_1.2 LED9_1_1.1 LED9_1_1.2 LED9_1_2.1 LED9_1_2.2 LED9_2.1 LED9_2.2 LED9_2_1.1 LED9_2_1.2 LED9_2_2.1 LED9_2_2.2 LED9_3.1 LED9_3.2 LED9_4.1 LED9_4.2 LED10_1.1 LED10_1.2 LED10_1_1.1 LED10_1_1.2 LED10_1_2.1 LED10_1_2.2 LED10_2.1 LED10_2.2 LED10_2_1.1 LED10_2_1.2 LED10_2_2.1 LED10_2_2.2 LED10_3.1 LED10_3.2 LED10_4.1 LED10_4.2 LED11_1.1 LED11_1.2 LED11_1_1.1 LED11_1_1.2 LED11_1_2.1 LED11_1_2.2 LED11_2.1 LED11_2.2 LED11_2_1.1 LED11_2_1.2 LED11_2_2.1 LED11_2_2.2 LED11_3.1 LED11_3.2 LED11_4.1 LED11_4.2 LED12_1.1 LED12_1.2 LED12_1_1.1 LED12_1_1.2 LED12_1_2.1 LED12_1_2.2 LED12_2.1 LED12_2.2 LED12_2_1.1 LED12_2_1.2 LED12_2_2.1 LED12_2_2.2 LED12_3.1 LED12_3.2 LED12_4.1 LED12_4.2